# Altium PCB pcb.PcbDoc
Units mm, origin at the board's own origin, x right, y up, seen from the top; angles counter-clockwise.
Board outline 36.45 x 52.53 mm, 2 copper layers (Top Layer, Bottom Layer); 58 components, 77 nets, 235 pads, 44 vias.
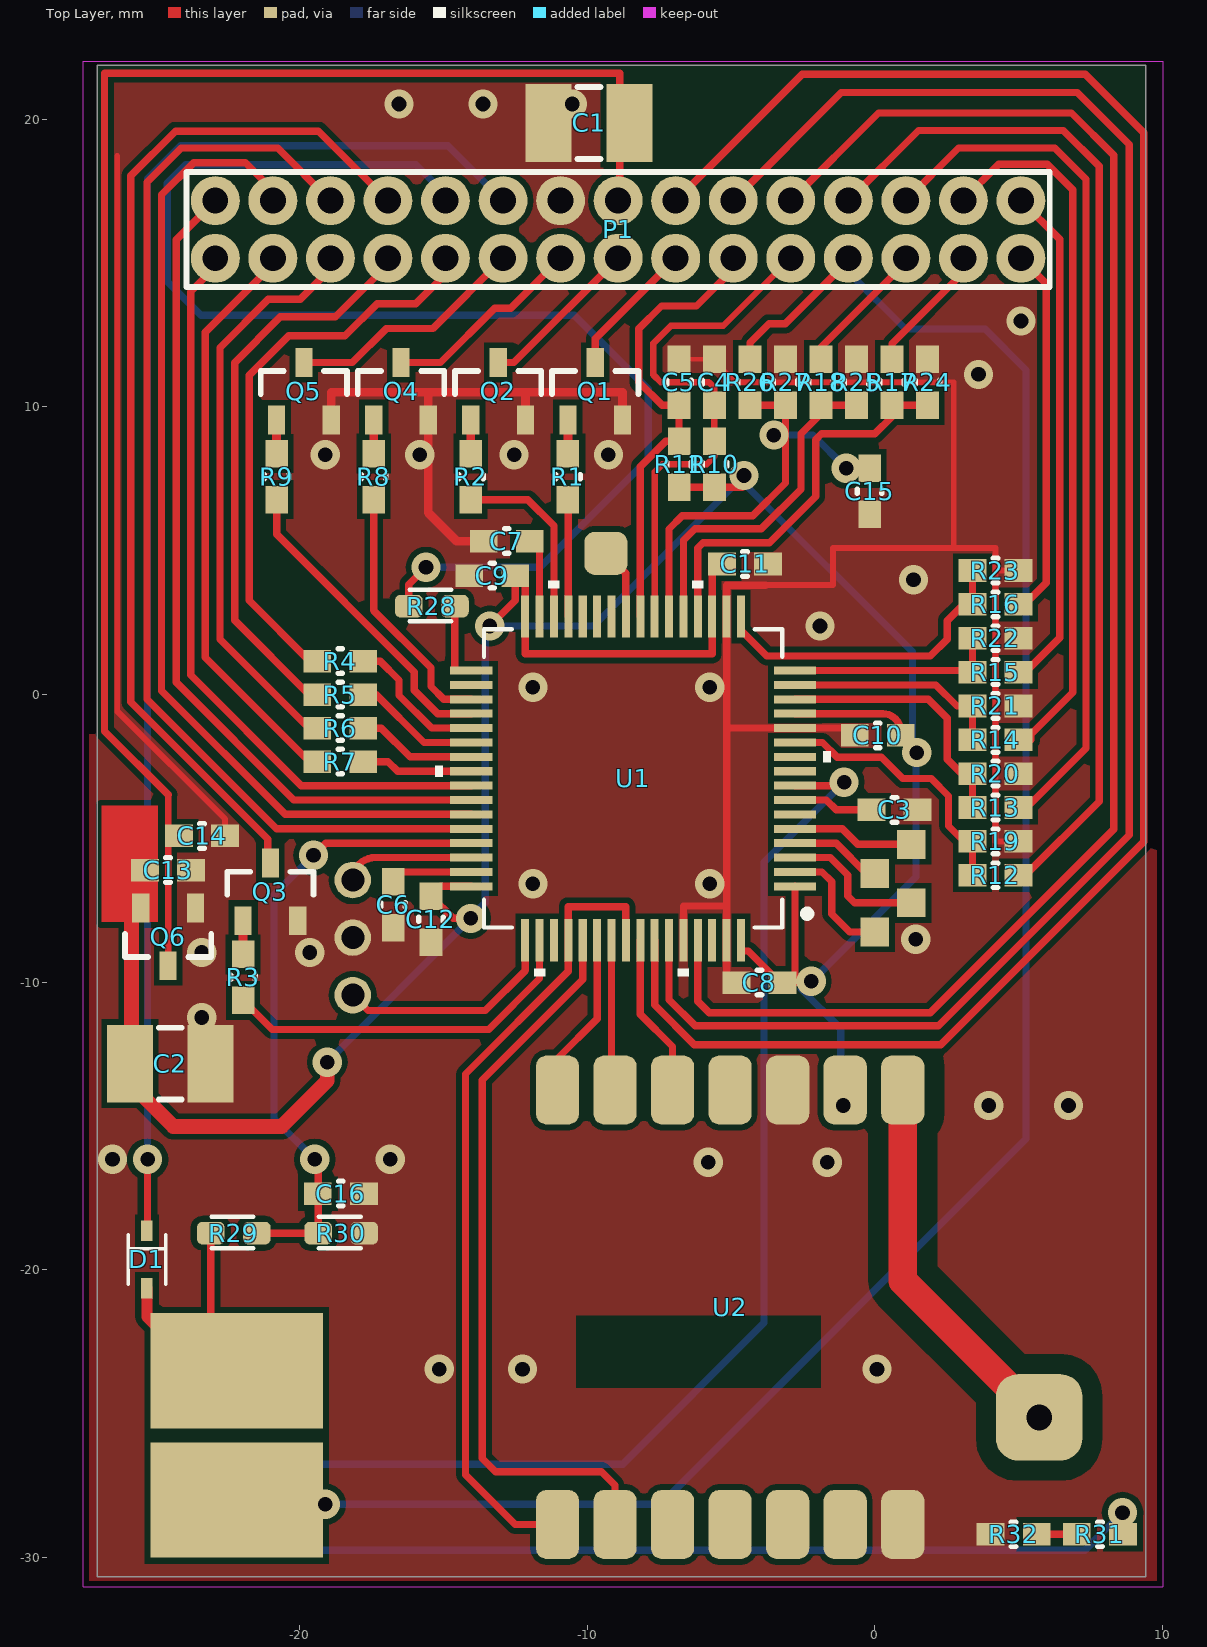
[diagram p0: Top Layer view]
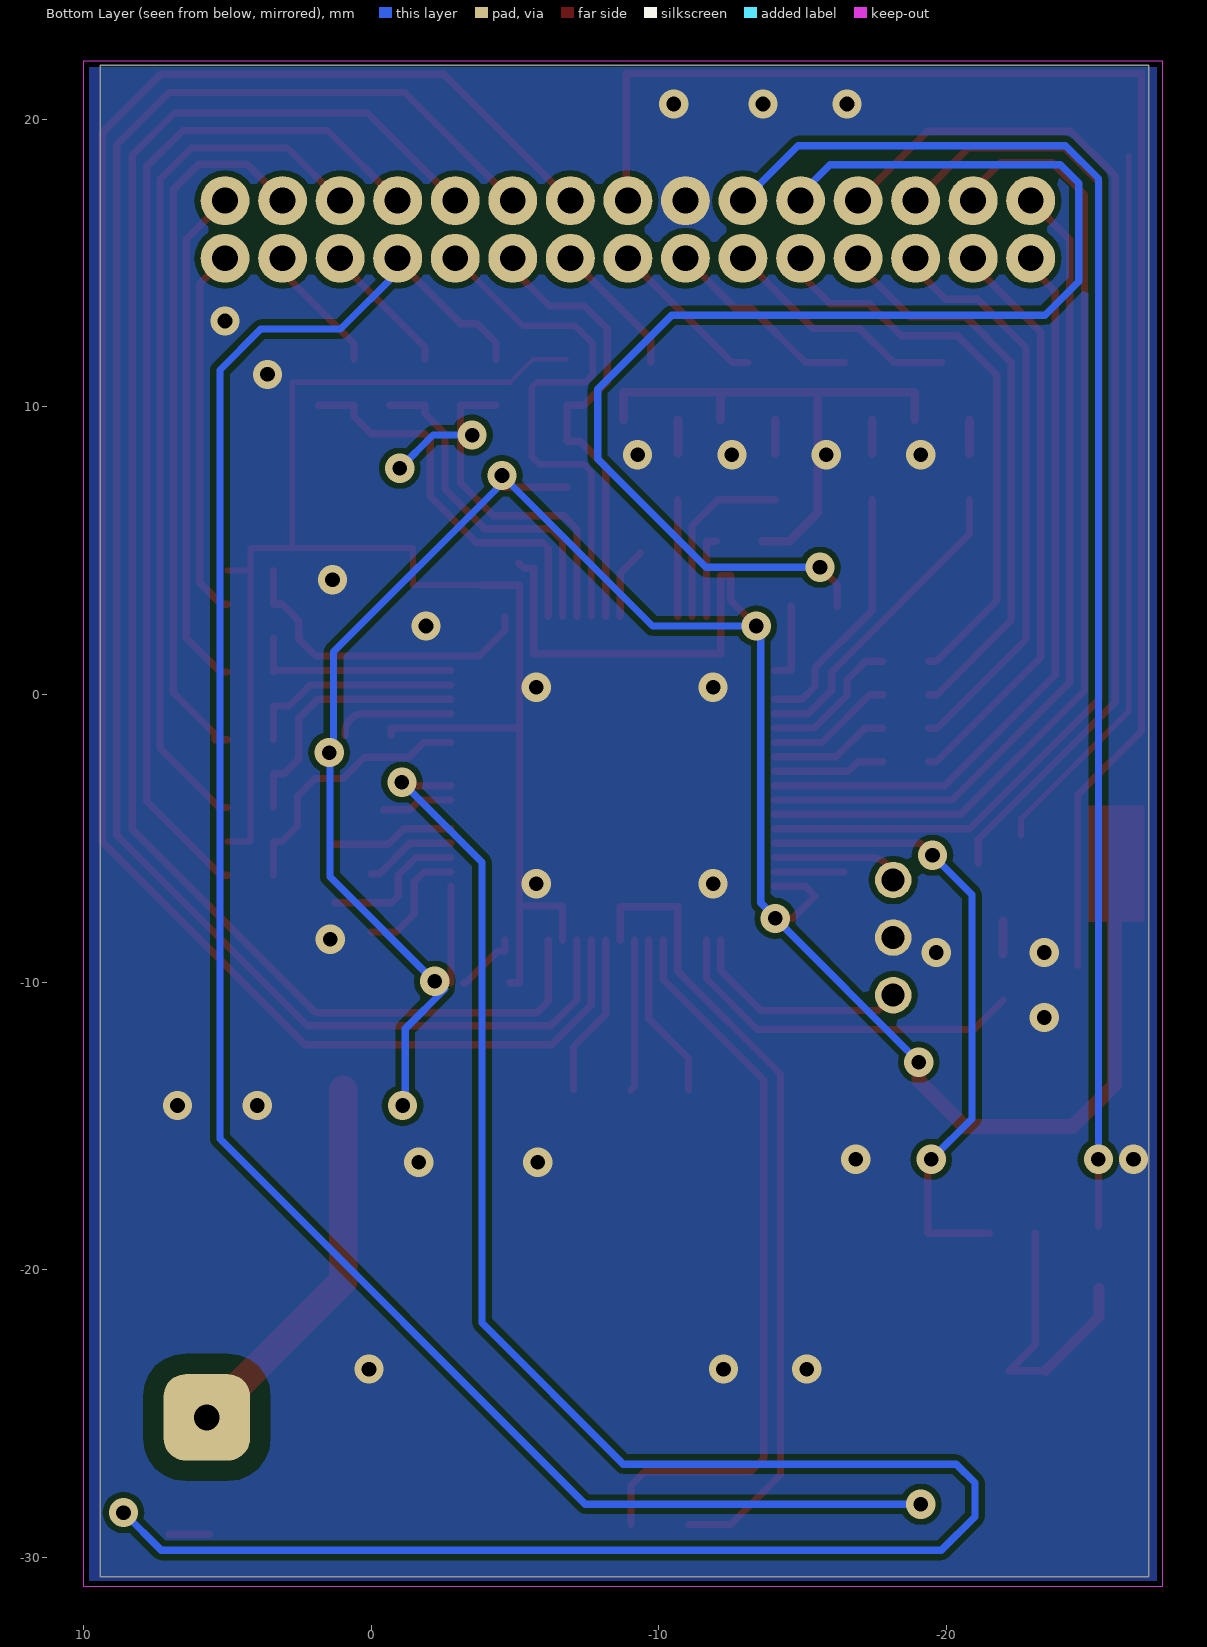
[diagram p1: Bottom Layer view, seen from below]
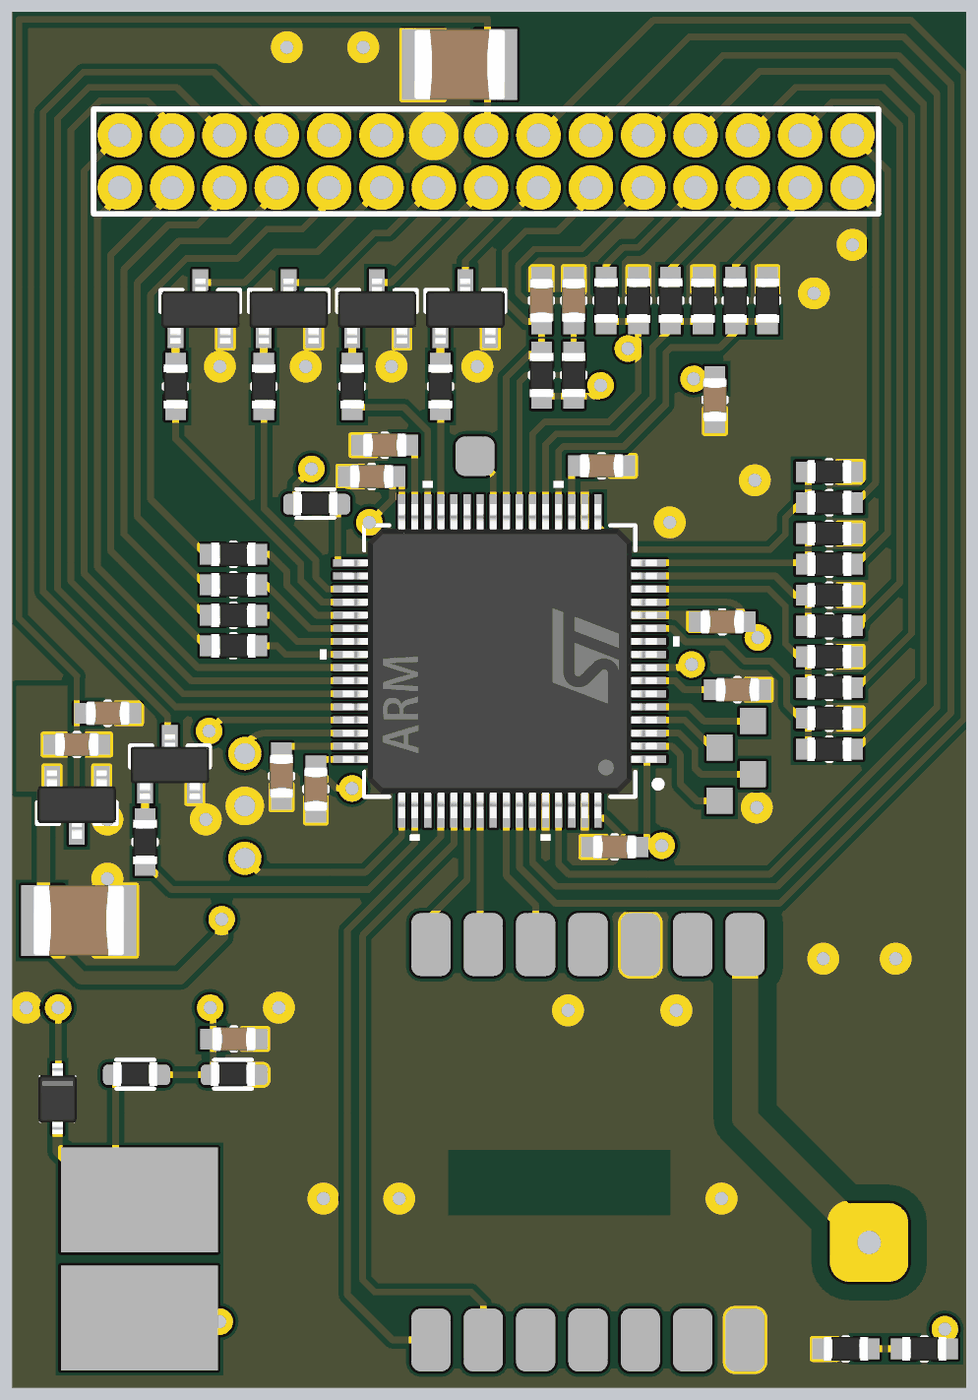
[diagram p2: 3D render of the assembled board from above, using the file's embedded part models]

## Layer stack, top to bottom
Top Solder: solder mask 0.0102, Solder Resist, Dk 3.5
Top Layer: signal copper 0.0356
Dielectric 1: dielectric 0.32, FR-4, Dk 4.8
Bottom Layer: signal copper 0.0356
Bottom Solder: solder mask 0.0102, Solder Resist, Dk 3.5

## Board outline
-27.026,-30.658 -27.026,21.869 9.423,21.869 9.423,-30.658

## Design rules (kind name [scope] priority, off if disabled: settings)
Clearance Clearance_1 [InNet('ANT')] p1: gap=0.203 ignorepadtopadclearanceinfootprint=FALSE except(0.7: Arc-Fill Arc-Poly Arc-Region Track-Fill Track-Poly Track-Region SMDPad-Fill SMDPad-Poly SMDPad-Region THPad-Fill THPad-Poly THPad-Region Via-Fill Via-Poly Via-Region Fill-Fill Fill-Poly Fill-Region Poly-Poly Poly-Region Region-Region)
Clearance [All] p2: gap=0.203 ignorepadtopadclearanceinfootprint=FALSE
MinimumSolderMaskSliver [All] p1 off: minsoldermaskwidth=0.254
PolygonConnect [All] p1: connectstyle=Direct reliefconductorwidth=0.254 reliefentries=4 polygonreliefangle="90 Angle" airgapwidth=0.254
RoutingVias [All] p1 off: holewidth=0.711 width=1.27 viastyle="Through Hole" minholewidth=0.711 minwidth=1.27 maxholewidth=0.711 maxwidth=1.27
SilkToSolderMaskClearance [IsPad] p1 off: minsilkscreentomaskgap=0.254 clearancetoexposedcopper=TRUE
SolderMaskExpansion [All] p1: expansion=0.102
Width [All] p1: maxlimit=12.7 minlimit=0.051 preferedwidth=0.254
28 further rules are at their usual default settings.

## Components (designator, comment, footprint, x,y, rotation, side; value= is the part's Value field where it differs from the comment)
C1 "Cap" RC_1210_T1.8 -9.931,19.863 r0 top value=100pF
C2 "Cap" RC_1210_T1.8 -24.486,-12.827 r180 top value=100pF
C3 "Cap" RC_0603 0.686,-4.009 r180 top value=100pF
C4 "Cap" RC_0603 -5.572,10.85 r270 top value=100pF
C5 "Cap" RC_0603 -6.805,10.85 r270 top value=100pF
C6 "Cap" RC_0603 -16.736,-7.309 r90 top value=100pF
C7 "Cap" RC_0603 -12.793,5.331 r0 top value=100pF
C8 "Cap" RC_0603 -4.007,-10.016 r0 top value=100pF
C9 "Cap" RC_0603 -13.293,4.132 r0 top value=100pF
C10 "Cap" RC_0603 0.104,-1.42 r0 top value=100pF
C11 "Cap" RC_0603 -4.507,4.538 r180 top value=100pF
C12 "Cap" RC_0603 -15.425,-7.809 r90 top value=100pF
C13 "Cap" RC_0603 -24.559,-6.104 r180 top value=100pF
C14 "Cap" RC_0603 -23.378,-4.91 r180 top value=100pF
C15 "Cap" RC_0603 -0.178,7.061 r90 top value=100pF
C16 "Cap" RC_0603 -18.556,-17.348 r180 top value=100pF
D1 "55V" RR_SOD-323 -25.296,-19.634 r90 top value="TVS DIODE 55VWM 100VC"
P1 "Header 15X2" HDR2X15-2mm -8.919,16.162 r180 top
Q1 "IRLML2502" RR_SOT-23 -9.716,10.54 r90 top value="MOSFET N-CH 20V 4.2A SOT-23-3"
Q2 "IRLML2502" RR_SOT-23 -13.09,10.54 r90 top value="MOSFET N-CH 20V 4.2A SOT-23-3"
Q3 "IRLML2502" RR_SOT-23 -21.003,-6.859 r90 top value="MOSFET N-CH 20V 4.2A SOT-23-3"
Q4 "IRLML2502" RR_SOT-23 -16.464,10.54 r90 top value="MOSFET N-CH 20V 4.2A SOT-23-3"
Q5 "IRLML2502" RR_SOT-23 -19.839,10.54 r90 top value="MOSFET N-CH 20V 4.2A SOT-23-3"
Q6 "IRLML2502" RR_SOT-23 -24.559,-8.424 r270 top value="MOSFET N-CH 20V 4.2A SOT-23-3"
R1 "Res1" RR_0603#1 -10.666,7.57 r270 top value=1K
R2 "Res1" RR_0603#1 -14.04,7.57 r270 top value=1K
R3 "Res1" RR_0603#1 -21.953,-9.829 r270 top value=1K
R4 "Res1" RR_0603#1 -18.578,1.16 r180 top value=1K
R5 "Res1" RR_0603#1 -18.578,-0.004 r180 top value=1K
R6 "Res1" RR_0603#1 -18.578,-1.168 r180 top value=1K
R7 "Res1" RR_0603#1 -18.578,-2.332 r180 top value=1K
R8 "Res1" RR_0603#1 -17.414,7.57 r270 top value=1K
R9 "Res1" RR_0603#1 -20.789,7.57 r270 top value=1K
R10 "Res1" RR_0603#1 -5.572,8.006 r270 top value=1K
R11 "Res1" RR_0603#1 -6.8,8.006 r270 top value=1K
R12 "Res1" RR_0603#1 4.193,-6.282 r0 top value=1K
R13 "Res1" RR_0603#1 4.193,-3.928 r0 top value=1K
R14 "Res1" RR_0603#1 4.193,-1.574 r0 top value=1K
R15 "Res1" RR_0603#1 4.193,0.779 r0 top value=1K
R16 "Res1" RR_0603#1 4.193,3.133 r0 top value=1K
R17 "Res1" RR_0603#1 0.598,10.85 r90 top value=1K
R18 "Res1" RR_0603#1 -1.868,10.85 r90 top value=1K
R19 "Res1" RR_0603#1 4.193,-5.105 r180 top value=1K
R20 "Res1" RR_0603#1 4.193,-2.751 r180 top value=1K
R21 "Res1" RR_0603#1 4.193,-0.398 r180 top value=1K
R22 "Res1" RR_0603#1 4.193,1.956 r180 top value=1K
R23 "Res1" RR_0603#1 4.193,4.31 r180 top value=1K
R24 "Res1" RR_0603#1 1.831,10.85 r270 top value=1K
R25 "Res1" RR_0603#1 -0.635,10.85 r270 top value=1K
R26 "Res1" RR_0603#1 -4.334,10.85 r90 top value=1K
R27 "Res1" RR_0603#1 -3.101,10.85 r270 top value=1K
R28 "Res1" RR_0603#2 -15.443,3.097 r180 top value=1K
R29 "Res1" RR_0603#2 -22.327,-18.694 r180 top value=1K
R30 "Res1" RR_0603#2 -18.594,-18.694 r180 top value=1K
R31 "Res1" RR_0603#1 7.823,-29.185 r0 top value=1K
R32 "Res1" RR_0603#1 4.826,-29.185 r0 top value=1K
U1 "STM32F405RGT6" RR_LQFP-64 -8.4,-2.916 r180 top value="IC MCU 32BIT 1MB FLASH 64LQFP"
U2 "RFM12B" RFM12B -5.027,-21.293 r90 top

## Footprints (in the part's own frame and the unit in brackets; to place one, negate y for a bottom-side part, rotate by r counter-clockwise, add the part's x,y. Pads: shape width x height; smd on the part's side, far side on the other; paste and mask are expansions set on the pad)
HDR2X15-2mm [mm] "Connector; Header; 30x2 Position"
  round 1.7 hole 0.9: 1(-14,-1) 2(-14,1) 3(-12,-1) 4(-12,1) 5(-10,-1) 6(-10,1) 7(-8,-1) 8(-8,1) 9(-6,-1) 10(-6,1) 11(-4,-1) 12(-4,1) 13(-2,-1) 14(-2,1) 15(0,-1) 16(0,1) 17(2,-1) 18(2,1) 19(4,-1) 20(4,1) 21(6,-1) 22(6,1) 23(8,-1) 24(8,1) 25(10,-1) 26(10,1) 27(12,-1) 28(12,1) 29(14,-1) 30(14,1)
  silkscreen extent -15,-2 15,2
RC_0603 [mil] "Chip Capacitor"
  rect 38x31 smd: 1(-31.5,0) 2(31.5,0)
  silkscreen extent -3,-17 3,17, body extent -33,-18 33,18, height 35
RC_1210_T1.8 [mm] "Chip Capacitor"
  rect 1.6x2.7 smd: 1(-1.4,0) 2(1.4,0)
  silkscreen extent -0.4,-1.25 0.4,1.25, body extent -1.75,-1.35 1.75,1.35, height 1.8
RFM12B [mm]
  rrect50% 2.4x1.5 smd: 1(-7.55,6) 2(-7.55,4) 3(-7.55,2) 4(-7.55,0) 5(-7.55,-2) 6(-7.55,-4) 7(-7.55,-6) 8(7.55,-6) 9(7.55,-4) 10(7.55,-2) 11(7.55,0) 12(7.55,2) 13(7.55,4) 14(7.55,6)
  Top Layer pour cut-out: -2.8,-3.15 -0.3,-3.15 -0.3,5.35 -2.8,5.35
  body extent -7.95,-8.05 7.95,8.05, height 0.25
RR_0603#1 [mil] "Chip Resistor; Body 1.6 x 0.8 mm (LxW typ)"
  rect 38x31 smd: 1(-31.5,0) 2(31.5,0)
  silkscreen extent -3,-17 3,17, body extent -33,-18 33,18, height 22
RR_0603#2 [mil]
  rrect50% 38x31 smd: 1(-33.47,0.98) 2(29.53,0.98)
  silkscreen extent -29,-22 29,22, body extent -33,-18 33,18, height 22
RR_LQFP-64 [mil]
  rect 58x11 smd: 1(-221.5,147.64) 2(-221.5,127.95) 3(-221.5,108.27) 4(-221.5,88.58) 5(-221.5,68.9) 6(-221.5,49.21) 7(-221.5,29.53) 8(-221.5,9.84) 9(-221.5,-9.84) 10(-221.5,-29.53) 11(-221.5,-49.21) 12(-221.5,-68.9) 13(-221.5,-88.58) 14(-221.5,-108.27) 15(-221.5,-127.95) 16(-221.5,-147.64) 33(221.5,-147.64) 34(221.5,-127.95) 35(221.5,-108.27) 36(221.5,-88.58) 37(221.5,-68.9) 38(221.5,-49.21) 39(221.5,-29.53) 40(221.5,-9.84) 41(221.5,9.84) 42(221.5,29.53) 43(221.5,49.21) 44(221.5,68.9) 45(221.5,88.58) 46(221.5,108.27) 47(221.5,127.95) 48(221.5,147.64)
  rect 11x58 smd: 17(-147.64,-221.5) 18(-127.95,-221.5) 19(-108.27,-221.5) 20(-88.58,-221.5) 21(-68.9,-221.5) 22(-49.21,-221.5) 23(-29.53,-221.5) 24(-9.84,-221.5) 25(9.84,-221.5) 26(29.53,-221.5) 27(49.21,-221.5) 28(68.9,-221.5) 29(88.58,-221.5) 30(108.27,-221.5) 31(127.95,-221.5) 32(147.64,-221.5) 49(147.64,221.5) 50(127.95,221.5) 51(108.27,221.5) 52(88.58,221.5) 53(68.9,221.5) 54(49.21,221.5) 55(29.53,221.5) 56(9.84,221.5) 57(-9.84,221.5) 58(-29.53,221.5) 59(-49.21,221.5) 60(-68.9,221.5) 61(-88.58,221.5) 62(-108.27,221.5) 63(-127.95,221.5) 64(-147.64,221.5)
  silkscreen extent -271,-270 270,270, body extent -236,-236 236,236, height 59
RR_SOD-323 [mm]
  rect 0.701x0.403 smd: 1(-1,0)
  rect 0.703x0.401 smd: 2(1,0)
  silkscreen extent -0.85,-0.65 0.85,0.65, body extent -1.35,-0.72 1.35,0.73, height 1.1
RR_SOT-23 [mm] "SOT23, 3-Leads, Body 2.9x1.3mm, Pitch 0.95mm, Lead Span 2.3mm, IPC High Density"
  rect 1x0.6 smd: 1(-1,0.95) 2(-1,-0.95) 3(1,0)
  silkscreen extent -0.1,-1.5 0.7,1.5, body extent -1.33,-1.5 1.27,1.5, height 1.1

## Part data
C1 C2 C3 C4 C5 C6 C7 C8 C9 C10 C11 C12 C13 C14 C15 C16: "Capacitor", LatestRevisionDate=17-Jul-2002, LatestRevisionNote="Re-released for DXP Platform.", PackageDescription="Radial Cap, Thru-Hole; 2 Leads; 0.3 in Pin Spacing", PackageReference=RAD-0.3, Published=8-Jun-2000, Publisher="Altium Limited"
D1: library part D55V0M1B2WS-7, "DIODE TVS 55V", Manufacturer="Diodes Incorporated", Package=SOD-323, Cost=0,48, Order Number=D55V0M1B2WS-7
P1: "Header, 15-Pin, Dual row", LatestRevisionDate=17-Jul-2002, LatestRevisionNote="Re-released for DXP Platform.", Publisher="Altium Limited"
Q1 Q2 Q3 Q4 Q5 Q6: "MOSFET N-CH 20V 4.2A SOT-23-3", Manufacturer="Infineon Technologies", Package=SOT-23, Cost=0,52, Order Number="IRLML2502GTRPBF ( IRLML6246TRPBF (INFIN))"
R1 R2 R3 R4 R5 R6 R7 R8 R9 R10 R11 R12 R13 R14 R15 R16 R17 R18 R19 R20 R21 R22 R23 R24 R25 R26 R27 R28 R29 R30 R31 R32: "Resistor", LatestRevisionDate=17-Jul-2002, LatestRevisionNote="Re-released for DXP Platform.", PackageDescription="Axial Device, Thru-Hole; 2 Leads; 0.3 in Pin Spacing", PackageReference=AXIAL-0.3, Published=8-Jun-2000, Publisher="Altium Limited"
U1: "MCU STM32F405RGT6", Manufacturer="ST Microelectronics", Package=64-LQFP, Cost=10,58, Order Number=STM32F405RGT6
U2: library part Component_1

## Free pads (board coordinates)
  round 1.27 hole 0.8: 1(-18.142,-10.449) 1(-18.142,-8.449) 1(-18.142,-6.449)
  rrect50% 1.5x1.5 smd: 2(-9.345,4.907)
  rrect50% 3x3 hole 0.9: 2(5.715,-25.121)
  rect 6x4 smd: 3(-22.174,-28) 3(-22.174,-23.5)
  rect 1x1 smd: 4(1.27,-5.209) 5(0,-6.224) 6(1.27,-7.24) 7(0,-8.255)

## Via types
v1: diameter 1.016, hole 0.508, Top Layer to Bottom Layer, 44 vias

## Nets (pads, with @x,y where several pads share a name; then routed paths per layer and width w, separated by ;. In a path a pad name is that pad's centre, name@x,y a point inside that pad or via, vN(x,y) a via of type N, cw(c..) or ccw(c..) an arc to the next point about the centre after c; other vN are vias at no path point)
3V3: C2.2 C8.2 C9.2 C10.2 C11.2 C12.2 C13.2 Q6.2 R10.2 R11.2 U1.1 U1.13 U1.19 U1.32 U1.48 U1.64 U2.9 | length 101.6
  Top Layer w0.254: -25.575,-4.504 -25.509,-4.57 ; v1(-14.044,-7.781) -14.654,-7.781 C12.2 -15.082,-6.666 U1.48 ; v1(-13.383,2.379) -12.493,3.27 C9.2 -12.15,4.132 U1.32 -12.15,1.414 -5.65,1.414 U1.19 -5.65,4.386 -5.307,4.386 C11.2@-5.128,4.564 ; R11.2 R10.2 v1@-4.595,7.205 ; U1.64 -4.65,-8.902 -4.637,-8.914 -4.397,-8.914 -3.295,-10.016 C8.2 ; C8.2@-2.774,-10.016 U1.1 ; U1.13 0.282,-0.666 cw(c0.282,-1.289) 0.904,-1.289 C10.2
  Top Layer w0.508: C13.2 -25.832,-6.576 -25.832,-13.564 -24.384,-15.011 -20.61,-15.011 -19.025,-13.426 v1(-19.025,-12.776)
  Bottom Layer w0.254: v1(-19.025,-12.776) -19.039,-12.776 v1(-14.044,-7.781) ; v1@-14.199,-7.899 -13.538,-7.239 v1@-13.538,2.379 ; v1(-13.383,2.379) -9.777,2.379 v1@-4.681,7.475 ; v1@-4.818,7.612 v1@-4.681,7.475 ; v1(-4.544,7.612) v1@-4.681,7.475 ; v1@-2.565,-10.236 -1.182,-11.62 v1@-1.182,-13.862 ; v1@-2.362,-10.135 1.435,-6.337 v1@1.435,-2.136 ; v1@1.308,-2.136 1.308,1.486 v1@-4.681,7.475
  other v1: -1.09,-14.283 -2.207,-9.965 1.463,-2.017
5V: C1.2 C14.2 P1.15 Q6.3 | length 54.7
  Top Layer w0.229: Q6.3 -24.559,-3.488
  Top Layer w0.254: -24.559,-3.488 -26.769,-1.278 -26.769,21.59 -8.865,21.59 P1.15@-8.865,16.688
_FAN0: P1.18 Q4.3 | length 7
  Top Layer w0.254: Q4.3 -15.094,11.54 -13.206,13.428 -12.653,13.428 P1.18
_FAN1: P1.20 Q5.3 | length 8.4
  Top Layer w0.254: Q5.3 -18.155,11.54 -16.978,12.717 -15.364,12.717 P1.20
_LED0: P1.14 Q1.3 | length 4.8
  Top Layer w0.254: Q1.3 -9.716,12.366 P1.14
_LED1: P1.16 Q2.3 | length 5.7
  Top Layer w0.254: Q2.3 -12.542,11.54 P1.16
_LED2: P1.23 Q3.3 | length 36.4
  Top Layer w0.254: Q3.3@-21.096,-5.859 -21.096,-5.021 -25.855,-0.262 -25.855,18.026 -24.305,19.575 -19.332,19.575 P1.23
_SAIN0: P1.7 R12.2 | length 36.2
  Top Layer w0.254: P1.7 1.519,19.601 6.556,19.601 7.8,18.356 7.8,-3.717 5.235,-6.282 R12.2
_SAIN1: P1.5 R13.2 | length 30.4
  Top Layer w0.254: P1.5 2.91,18.991 6.26,18.991 7.341,17.91 7.341,-1.864 5.277,-3.928 R13.2
_SAIN2: P1.3 R14.2 | length 24.9
  Top Layer w0.254: P1.3 3.081,17.205 4.308,18.432 5.997,18.432 6.882,17.547 6.882,0.072 5.421,-1.39 5.421,-1.574 R14.2
_SAIN3: P1.1 R15.2 | length 17.7
  Top Layer w0.254: R15.2 5.235,0.779 6.424,1.968 6.424,15.82 P1.1
_SAIN4: P1.2 R16.2 | length 12.9
  Top Layer w0.254: R16.2 5.213,3.133 5.965,3.885 5.965,14.278 P1.2
_SAIN5: P1.4 R17.2 | length 4.5
  Top Layer w0.254: R17.2 0.598,12.195 3.081,14.678 P1.4
_SAIN6: P1.6 R18.2 | length 4.7
  Top Layer w0.254: R18.2 -1.868,12.066 1.081,15.015 P1.6
_VBat: P1.8 pad.3@-22.174,-28 R26.2 | length 69.7
  Top Layer w0.254: R26.2 -4.334,12.225 -3.677,12.882 -3.109,12.882 -0.919,15.072 P1.8
  Bottom Layer w0.254: v1(-19.101,-28.143) -7.442,-28.143 5.258,-15.443 5.258,11.278 3.835,12.7 1.067,12.7 -0.919,14.686 P1.8
ADC0: R12.1 R19.2 U1.11 | length 9.4
  Top Layer w0.254: U1.11 -1.819,-1.666 -1.301,-2.184 0.237,-2.184 0.973,-2.921 1.962,-2.921 2.565,-3.524 2.565,-4.57 3.101,-5.105 R19.2 R12.1
ADC1: R13.1 R20.2 U1.14 | length 9.2
  Top Layer w0.254: U1.14 1.862,-0.166 2.52,-0.824 2.52,-2.25 3.021,-2.751 R20.2 R13.1
ADC2: R14.1 R21.2 U1.15 | length 7.6
  Top Layer w0.254: U1.15 2.124,0.334 2.856,-0.398 R21.2 R14.1
ADC3: R15.1 R22.2 U1.16 | length 7.4
  Top Layer w0.254: U1.16 3.339,0.834 R15.1 R22.2
ADC4: R16.1 R23.2 U1.17 | length 11.2
  Top Layer w0.254: U1.17 -4.65,2.234 -3.754,1.338 1.933,1.338 2.52,1.925 2.52,2.566 3.086,3.133 R16.1 R23.2
ADC5: R17.1 R24.2 U1.20 | length 13.8
  Top Layer w0.254: U1.20 -6.15,5.092 -5.967,5.275 -3.66,5.275 -2.055,6.88 -2.055,8.856 -1.852,9.06 0.002,9.06 0.598,9.655 R17.1 R24.2
ADC6: R18.1 R25.2 U1.21 | length 11.9
  Top Layer w0.254: U1.21 -6.65,5.357 -6.249,5.758 -3.944,5.758 -2.563,7.139 -2.563,9.06 -1.868,9.755 R18.1 R25.2
ADC7: C15.2 R26.1 R27.2 U1.22 | length 14.7
  Top Layer w0.254: U1.22 -7.15,5.753 -6.688,6.215 -4.239,6.215 -3.101,7.353 R27.2 R26.1
  Bottom Layer w0.254: v1(-3.505,9.017) -2.146,9.017 v1(-0.991,7.861)
ADC8: C4.2 P1.10 R10.1 U1.23 | length 19.1
  Top Layer w0.229: U1.23 -7.65,7.732 -7.376,8.006 -5.84,8.006 -5.572,8.273 R10.1 C4.2 -5.572,10.659 -5.763,10.85 -7.437,10.85 -7.694,11.108 -7.694,12.209 -7.084,12.819 -5.263,12.819 P1.10
ADC9: C5.2 P1.12 R11.1 U1.24 | length 16.3
  Top Layer w0.254: U1.24 -8.15,7.918 -7.262,8.806 R11.1@-6.805,8.806 ; R11.1 R11.1@-6.805,8.806 ; P1.12 -4.919,14.781 -6.195,13.505 -7.414,13.505 -8.202,12.717 -8.202,10.863 -7.389,10.05 C5.2 R11.1@-6.805,8.806
ADC10: pad.2@-9.345,4.907 U1.25 | length 2.5
  Top Layer w0.254: pad.2@-9.345,4.907 -8.65,4.212 U1.25
ADC11: U1.26
ADC12: U1.27
ANT: pad.2@5.715,-25.121 U2.8 | length 13.3
  Top Layer w1: U2.8 0.973,-20.379 pad.2@5.715,-25.121
BTN_ON: D1.1 pad.3@-22.174,-23.5 R29.2 | length 10
  Top Layer w0.254: pad.3@-23.431,-23.5 -22.174,-23.5 -23.077,-22.598 R29.2
  Top Layer w0.381: D1.1 -25.296,-21.635 pad.3@-23.431,-23.5
BTN_ON_SNS: C16.2 R29.1 R30.2 U1.45 | length 22.1
  Top Layer w0.254: R29.1 R30.2 -19.344,-16.274 v1(-19.463,-16.154) ; v1(-19.507,-5.588) -19.086,-5.166 U1.45
  Bottom Layer w0.254: v1(-19.507,-5.588) -20.879,-6.96 -20.879,-14.739 v1(-19.463,-16.154)
C\S\: U1.54 U2.14 | length 5.8
  Top Layer w0.254: U2.14 -11.027,-12.651 -9.65,-11.273 U1.54
FAN0: R8.2 U1.35 | length 8.9
  Top Layer w0.254: R8.2 -17.414,2.917 -15.425,0.927 -15.425,0.281 -14.978,-0.166 U1.35
FAN1: R9.2 U1.36 | length 10.9
  Top Layer w0.254: R9.2 -20.789,5.574 -16,0.785 -16,0.144 -15.189,-0.666 U1.36
GND: C1.1 C2.1 C3.1 C4.1 C5.1 C6.1 C7.1 C8.1 C9.1 C10.1 C11.1 C12.1 C13.1 C14.1 C15.1 C16.1 P1.17 pad.1@-18.142,-8.449 Q1.2 Q2.2 Q3.2 Q4.2 Q5.2 Q6.1 R19.1 R20.1 R21.1 R22.1 R23.1 R24.1 R25.1 R27.1 R30.1 R32.1 U1.12 U1.18 U1.60 U1.63 U2.7 U2.10 | length 104.4
  Top Layer w0.152: C5.1 -5.624,11.65 -4.824,10.85
  Top Layer w0.203: -26.325,18.712 -26.325,-0.58 -22.578,-4.326 C14.1 ; -4.824,10.85 2.746,10.85 2.746,5.097 ; -3.808,3.802 -1.456,3.802 -1.456,5.097 2.746,5.097 ; R19.1 4.193,-5.105 4.193,4.31 ; R23.1 4.193,4.31 ; 2.746,5.097 4.193,5.097 4.193,4.31
  Top Layer w0.254: U1.60 -6.65,-7.349 -5.15,-7.349 ; C8.1 -5.15,-10.016 U1.63 -5.15,-7.349 ; -3.808,3.802 -5.15,3.802 U1.18 -5.15,-1.166 ; C10.1 -0.696,-1.166 U1.12 -5.15,-1.166 ; -5.15,-7.349 -5.15,-1.166
  Top Layer w0.305: Q5.2 -18.889,10.507 -15.514,10.507 ; C7.1 -14.529,5.331 -15.514,6.316 Q4.2 -15.514,10.507 ; Q2.2 -12.14,10.507 ; Q1.2 -8.766,10.507 -12.14,10.507 ; -15.514,10.507 -12.14,10.507
  other v1: -15.138,-23.444 -12.243,-23.444 0.076,-23.444 -5.791,-16.256 -1.651,-16.256 -26.492,-16.154 -16.84,-16.154 3.962,-14.283 6.731,-14.283 -23.393,-11.227 -23.393,-8.966 -19.634,-8.966 1.422,-8.509 -11.88,-6.579 -5.738,-6.579 -11.88,0.254 -5.738,0.254 -1.905,2.379 1.346,3.988 -19.094,8.331 -15.815,8.331 -12.536,8.331 -9.256,8.331 3.607,11.125 5.081,12.979 -16.535,20.523 -13.614,20.523 -10.516,20.523
I\R\Q\: U1.53 U2.2 | length 25.8
  Top Layer w0.254: U1.53 -10.15,-9.906 -13.637,-13.394 -13.637,-26.551 -13.18,-27.008 -9.497,-27.008 -9.027,-27.479 U2.2
LED0: R1.2 U1.29 | length 4.1
  Top Layer w0.254: U1.29 R1.2@-10.65,6.77
LED1: R2.2 U1.30 | length 6.4
  Top Layer w0.254: R2.2 -12.059,6.77 -11.15,5.861 U1.30
LED2: R3.2 U1.50 | length 12.8
  Top Layer w0.254: R3.2 -20.941,-11.641 -13.419,-11.641 -11.65,-9.872 U1.50
LED_IND: R31.2 U1.8 | length 72.9
  Top Layer w0.254: U1.8 -1.185,-3.166 v1(-1.067,-3.048)
  Bottom Layer w0.254: v1(-1.067,-3.048) -3.851,-5.833 -3.851,-21.835 -8.763,-26.746 -20.332,-26.746 -20.98,-27.395 -20.98,-28.575 -19.812,-29.743 7.298,-29.743 v1(8.611,-28.431)
MISO: U1.52 U1.56 U2.1 | length 28.3
  Top Layer w0.254: U2.1 -12.5,-28.843 -14.222,-27.121 -14.222,-13.191 -10.65,-9.619 U1.52 -10.65,-7.374 -8.65,-7.374 U1.56
MOSI: U1.57 U2.12 | length 5.7
  Top Layer w0.254: U1.57 -8.15,-11.109 -7.027,-12.232 U2.12
NC0: pad.7 U1.2 | length 4.3
  Top Layer w0.254: U1.2 -1.832,-6.166 -1.498,-6.5 -1.498,-7.626 -0.868,-8.255 pad.7
NC1: pad.6 U1.3 | length 5.1
  Top Layer w0.254: U1.3 -1.547,-5.666 -0.94,-6.274 -0.94,-7.002 -0.702,-7.24 pad.6
NC2: pad.5 U1.4 | length 3.2
  Top Layer w0.254: U1.4 -1.343,-5.166 -0.285,-6.224 pad.5
NC3: pad.4 U1.5 | length 4.3
  Top Layer w0.254: U1.5 -1.134,-4.666 -0.591,-5.209 pad.4
NC4: U1.6
NetC3_2: C3.2 U1.7 | length 2.5
  Top Layer w0.254: U1.7 -1.684,-3.666 -1.342,-4.009 C3.2@-0.429,-4.009
NetC6_2: C6.2 U1.47 | length 2.4
  Top Layer w0.254: C6.2@-16.431,-6.166 U1.47
NetC7_2: C7.2 U1.31 | length 3
  Top Layer w0.254: C7.2 -11.65,5.331 U1.31
NetP1_21: P1.21 R28.2 | length 45.6
  Top Layer w0.254: R28.2 -16.193,3.822 v1(-15.596,4.42)
  Bottom Layer w0.254: v1(-15.596,4.42) -11.633,4.42 -7.869,8.184 -7.869,10.612 -10.439,13.183 -23.414,13.183 -24.587,14.356 -24.587,17.78 -23.952,18.415 -15.944,18.415 -14.919,17.39 P1.21
NetQ1_1: Q1.1 R1.1 | length 1.2
  Top Layer w0.305: R1.1 Q1.1
NetQ2_1: Q2.1 R2.1 | length 1.2
  Top Layer w0.305: R2.1 Q2.1
NetQ3_1: Q3.1 R3.1 | length 1.2
  Top Layer w0.305: R3.1 Q3.1
NetQ4_1: Q4.1 R8.1 | length 1.2
  Top Layer w0.305: R8.1 Q4.1
NetQ5_1: Q5.1 R9.1 | length 1.2
  Top Layer w0.305: R9.1 Q5.1
NetR4_1: R4.1 U1.37 | length 5
  Top Layer w0.254: R4.1 -17.19,1.16 -16.533,0.503 -16.533,-0.034 -15.4,-1.166 U1.37
NetR5_1: R5.1 U1.38 | length 4.4
  Top Layer w0.254: R5.1 -17.327,-0.004 -15.665,-1.666 U1.38
NetR6_1: R6.1 U1.39 | length 4.2
  Top Layer w0.254: R6.1 -17.148,-1.168 -16.15,-2.166 U1.39
NetR7_1: R7.1 U1.40 | length 3.9
  Top Layer w0.254: R7.1 -16.918,-2.332 -16.584,-2.666 U1.40
NetR28_1: R28.1 U1.33 | length 2.8
  Top Layer w0.254: R28.1 -14.593,0.834 U1.33
NetR31_1: R31.1 R32.2 | length 1.4
  Top Layer w0.254: R32.2 R31.1
RET: D1.2 P1.19 | length 49.8
  Top Layer w0.254: D1.2@-25.273,-18.484 v1(-25.273,-16.154)
  Bottom Layer w0.254: v1@-25.273,-15.926 -25.273,17.932 -24.13,19.075 -14.832,19.075 P1.19
SCK: U1.55 U2.13 | length 5.3
  Top Layer w0.254: U1.55 -9.15,-13.621 U2.13
SIN0: P1.22 R4.2 | length 19.9
  Top Layer w0.254: R4.2 -19.632,1.16 -21.74,3.268 -21.74,11.092 -20.368,12.463 -18.413,12.463 -17.295,13.581 -15.949,13.581 -14.919,14.61 P1.22
SIN1: P1.24 R5.2 | length 19.8
  Top Layer w0.254: R5.2 -19.661,-0.004 -22.248,2.583 -22.248,11.533 -20.657,13.124 -18.743,13.124 -16.919,14.947 P1.24
SIN2: P1.26 R6.2 | length 20.1
  Top Layer w0.254: R6.2 -19.666,-1.168 -22.756,1.922 -22.756,12.057 -21.08,13.733 -19.97,13.733 -18.919,14.785 P1.26
SIN3: P1.28 R7.2 | length 20.2
  Top Layer w0.254: P1.28 -20.919,14.935 -23.264,12.59 -23.264,1.287 -19.645,-2.332 R7.2
SRV0: P1.30 U1.41 | length 26.2
  Top Layer w0.254: P1.30 -22.919,14.858 -23.772,14.005 -23.772,0.678 -19.928,-3.166 U1.41
SRV1: P1.29 U1.42 | length 29.3
  Top Layer w0.254: P1.29 -24.28,15.801 -24.28,0.424 -20.19,-3.666 U1.42
SRV2: P1.27 U1.43 | length 34.9
  Top Layer w0.254: P1.27 -20.919,17.535 -21.867,18.483 -23.67,18.483 -24.788,17.365 -24.788,0.128 -20.493,-4.166 U1.43
SRV3: P1.25 U1.44 | length 38.7
  Top Layer w0.254: P1.25 -20.748,18.991 -24.106,18.991 -25.296,17.801 -25.296,-0.161 -20.79,-4.666 U1.44
SRV4: P1.13 U1.58 | length 66.3
  Top Layer w0.254: U1.58 -7.65,-10.791 -6.274,-12.167 2.297,-12.167 9.35,-5.114 9.35,19.524 7.318,21.556 -2.525,21.556 P1.13
SRV5: P1.11 U1.59 | length 61.2
  Top Layer w0.254: U1.59 -7.15,-10.605 -6.24,-11.514 2.212,-11.514 8.842,-4.885 8.842,19.118 7.038,20.921 -1.16,20.921 P1.11
SRV6: P1.9 U1.61 | length 55.9
  Top Layer w0.254: U1.61 -6.15,-10.665 -5.758,-11.057 1.933,-11.057 8.308,-4.682 8.308,18.737 6.835,20.21 0.129,20.21 P1.9
SWCLK: pad.1@-18.142,-10.449 U1.49 | length 7.8
  Top Layer w0.254: pad.1@-18.142,-10.449 -17.609,-10.981 -13.536,-10.981 -12.15,-9.595 U1.49
SWDIO: pad.1@-18.142,-6.449 U1.46 | length 4.6
  Top Layer w0.254: pad.1@-18.142,-6.449 cw(c-17.36,-6.449) -17.36,-5.666 U1.46
pads on no net: U1.9 U1.10 U1.28 U1.34 U1.51 U1.62 U2.3 U2.4 U2.5 U2.6 U2.11

## Polygon pours and split planes (outlines as drawn)
GND on Top Layer "Top Layer-GND" (solid, remove dead copper, pour order 0): 11.003,-31.904 -29.613,-31.895 -29.662,23.995 10.997,24.004
GND on Bottom Layer "Top Layer-GND" (solid, remove dead copper, pour order 2): 12.4,-32.8 -30.1,-32.8 -30.1,23.7 12.4,23.7

## Keep-outs
Keep-Out Layer:
  lines w0: -27.5,-31 -27.5,22 10,22 10,-31 -27.5,-31

## Other copper
Top Layer:
  region net 3V3: -24.915,-3.861 -26.871,-3.861 -26.871,-7.908 -24.915,-7.908